# Altium PCB Thermostat_EEM_Cryo.PCBDOC (part 2 of 2)
Units mm, origin at the board's own origin, x right, y up, seen from the top; angles counter-clockwise.
Board outline 44.89 x 73.5 mm, 4 copper layers (TOP, G1, L2, BOT), stack 1.55 mm thick; 85 components, 79 nets, 401 pads, 80 vias.
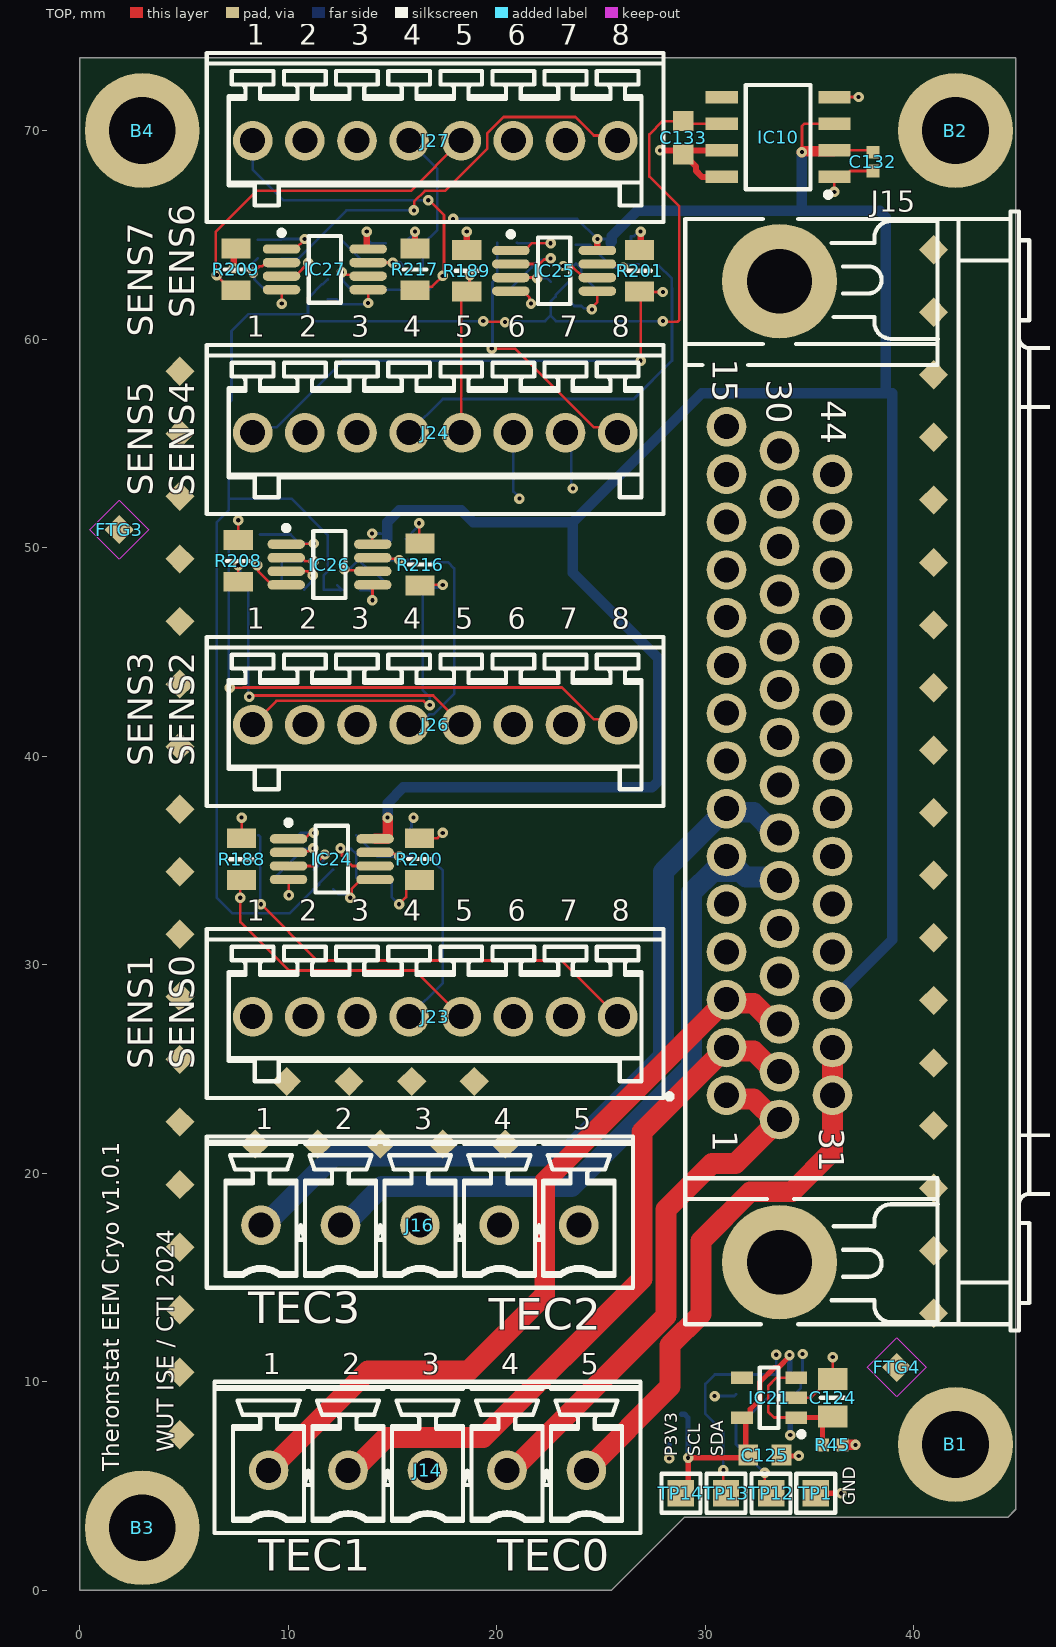
[diagram p0: TOP view]

## Via types
v1: diameter 0.5, hole 0.2, TOP to BOT, tented both sides, 80 vias

## Nets (pads, with @x,y where several pads share a name; then routed paths per layer and width w, separated by ;. In a path a pad name is that pad's centre, name@x,y a point inside that pad or via, vN(x,y) a via of type N, cw(c..) or ccw(c..) an arc to the next point about the centre after c; other vN are vias at no path point) (continued)
TECC3+: (continued)
  BOT w1: J16.2@12.742,17.595 14.509,19.362 23.591,19.362 29.348,25.119 29.348,33.462 30.367,34.481 31.673,34.481 31.95,34.204 33.388,34.204 J15.21
TECC3-: J15.7 J15.22 J16.1 | length 38.5
  BOT w1: J16.1@8.932,17.595 12.166,20.829 23.218,20.829 28,25.612 28,34.464 J15.7 31.192,37.312 32.327,37.312 33.316,36.322 J15.22
Vrefc0+: J15.37
Vrefc0-: J15.38
Vrefc1+: J15.39
Vrefc1-: J15.40
Vrefc2+: J15.41
Vrefc2-: J15.42
Vrefc3+: J15.43
Vrefc3-: J15.44
pads on no net: B1.1 B2.1 B3.1 B4.1 D35.1 D35.3 FTG1.1 FTG2.1 FTG3.1 FTG4.1 IC10.5 IC20.5 IC21.4

## Polygon pours and split planes (outlines as drawn)
GND on G1 (split plane): 44.383,58.83 44.356,58.785 44.319,58.698 44.297,58.606 44.29,58.512 44.29,56.59 44.29,19.049 44.297,18.955 44.319,18.863 44.356,18.776 44.383,18.731 44.383,4.102 44.292,4.01 28.993,4.01 28.894,4.001 28.798,3.972 28.71,3.924 28.632,3.861 25.282,0.51 0.51,0.51 0.51,72.99 44.383,72.99

## Other copper
G1 (plane layer: these items are gaps in the copper):
  lines w1.2: 44.892,19.049 44.892,56.59 44.892,58.512

## Silkscreen, mask and mechanical layers (free items; w line width, h text height)
TopOverlay:
  text "SENS6" at 5.5,61 h1.2 r90
  text "SENS7" at 3.5,60.114 h1.2 r90
  text "SENS5" at 3.5,52.5 h1.2 r90
  text "SENS4" at 5.5,52.5 h1.2 r90
  text "SENS3" at 3.5,39.514 h1.2 r90
  text "SENS2" at 5.5,39.514 h1.2 r90
  text "SENS1" at 3.5,25 h1.2 r90
  text "SENS0" at 5.5,25 h1.2 r90
  text "TEC3" at 8.09,12.817 h1.52
  text "TEC2" at 19.617,12.501 h1.52
  text "WUT ISE / CTI 2024" at 4.525,6.613 h0.8 r90
  text "P3V3" at 28.669,6.444 h0.6 r90
  text "SCL" at 29.77,6.444 h0.6 r90
  text "SDA" at 30.871,6.444 h0.6 r90
  text "Theromstat EEM Cryo v1.0.1" at 1.898,5.717 h0.8 r90
  text "GND" at 37.205,4.078 h0.6 r90
  text "TEC1" at 8.577,0.944 h1.52
  text "TEC0" at 20.029,0.944 h1.52
BottomOverlay:
  drawing of 1234 lines, arcs and shapes, not listed
  text "WUT ISE  / CTI 2024" at 39.205,31.766 h1.02 r270
  text "Thermostat EEM Cryo v1.0.1" at 41.14,18.812 h1.52 r270
Mechanical1:
  drawing of 302 lines, arcs and shapes, not listed
  text "Layer" at 71.781,56.459 h1.52
  text "Name" at 82.193,56.459 h1.52
  text "Material" at 104.285,56.459 h1.52
  text "Thickness" at 126.123,56.459 h1.52
  text "Constant" at 142.629,56.459 h1.52
  text "Board Layer Stack" at 157.103,56.459 h1.52
  text "TopOverlay" at 82.193,53.411 h1.52
  text "TopSolder" at 82.193,50.363 h1.52
  text "Solder Resist" at 104.285,50.363 h1.52
  text "0.010mm" at 126.123,50.363 h1.52
  text "3.5" at 142.629,50.363 h1.52
  text "1" at 71.781,47.315 h1.52
  text "TOP" at 82.193,47.315 h1.52
  text "0.035mm" at 126.123,47.315 h1.52
  text "Dielectric1" at 82.193,44.267 h1.52
  text "FR-4" at 104.285,44.267 h1.52
  text "0.180mm" at 126.123,44.267 h1.52
  text "4.8" at 142.629,44.267 h1.52
  text "2" at 71.781,41.219 h1.52
  text "G1" at 82.193,41.219 h1.52
  text "CF-004" at 104.285,41.219 h1.52
  text "0.035mm" at 126.123,41.219 h1.52
  text "Dielectric2" at 82.193,38.171 h1.52
  text "Core-042" at 104.285,38.171 h1.52
  text "1.050mm" at 126.123,38.171 h1.52
  text "4.6" at 142.629,38.171 h1.52
  text "3" at 71.781,35.123 h1.52
  text "L2" at 82.193,35.123 h1.52
  text "CF-004" at 104.285,35.123 h1.52
  text "0.035mm" at 126.123,35.123 h1.52
  text "Dielectric3" at 82.193,32.075 h1.52
  text "FR-4" at 104.285,32.075 h1.52
  text "0.180mm" at 126.123,32.075 h1.52
  text "4.8" at 142.629,32.075 h1.52
  text "4" at 71.781,29.027 h1.52
  text "BOT" at 82.193,29.027 h1.52
  text "0.035mm" at 126.123,29.027 h1.52
  text "BottomSolder" at 82.193,25.979 h1.52
  text "Solder Resist" at 104.285,25.979 h1.52
  text "0.010mm" at 126.123,25.979 h1.52
  text "3.5" at 142.629,25.979 h1.52
  text "BottomOverlay" at 82.193,22.931 h1.52

## Text inside footprints (layer, text, board x,y; h text height)
J14: TopOverlay "1" at 8.789,10.356 h1; TopOverlay "2" at 12.599,10.356 h1; TopOverlay "3" at 16.409,10.356 h1; TopOverlay "4" at 20.219,10.356 h1; TopOverlay "5" at 24.029,10.356 h1
J15: TopOverlay "15" at 30.36,59.064 h1.2 r270; TopOverlay "31" at 35.46,22.164 h1.2 r270; TopOverlay "44" at 35.56,57.064 h1.2 r270; TopOverlay "30" at 32.96,58.064 h1.2 r270; TopOverlay "1" at 30.36,22.064 h1.2 r270; Mechanical14 "15" at 30.36,59.064 h1.2 r270; Mechanical14 "31" at 35.46,22.164 h1.2 r270; Mechanical14 "44" at 35.56,57.064 h1.2 r270; Mechanical14 "30" at 32.96,58.064 h1.2 r270; Mechanical14 "1" at 30.36,22.064 h1.2 r270; Mechanical8 "PCB Edge" at 43.16,42.564 h1 r270
J16: TopOverlay "1" at 8.425,22.114 h1; TopOverlay "2" at 12.235,22.114 h1; TopOverlay "3" at 16.045,22.114 h1; TopOverlay "4" at 19.855,22.114 h1; TopOverlay "5" at 23.665,22.114 h1
J23: TopOverlay "7" at 23.025,32.114 h1; TopOverlay "5" at 18.025,32.114 h1; TopOverlay "3" at 13.025,32.114 h1; TopOverlay "2" at 10.525,32.114 h1; TopOverlay "1" at 8.025,32.114 h1; TopOverlay "4" at 15.525,32.114 h1; TopOverlay "6" at 20.525,32.114 h1; TopOverlay "8" at 25.525,32.114 h1
J24: TopOverlay "8" at 25.525,60.114 h1; TopOverlay "6" at 20.525,60.114 h1; TopOverlay "4" at 15.525,60.114 h1; TopOverlay "1" at 8.025,60.114 h1; TopOverlay "2" at 10.525,60.114 h1; TopOverlay "3" at 13.025,60.114 h1; TopOverlay "5" at 18.025,60.114 h1; TopOverlay "7" at 23.025,60.114 h1
J26: TopOverlay "7" at 23.025,46.114 h1; TopOverlay "5" at 18.025,46.114 h1; TopOverlay "3" at 13.025,46.114 h1; TopOverlay "2" at 10.525,46.114 h1; TopOverlay "1" at 8.025,46.114 h1; TopOverlay "4" at 15.525,46.114 h1; TopOverlay "6" at 20.525,46.114 h1; TopOverlay "8" at 25.525,46.114 h1
J27: TopOverlay "7" at 23.025,74.114 h1; TopOverlay "5" at 18.025,74.114 h1; TopOverlay "3" at 13.025,74.114 h1; TopOverlay "2" at 10.525,74.114 h1; TopOverlay "1" at 8.025,74.114 h1; TopOverlay "4" at 15.525,74.114 h1; TopOverlay "6" at 20.525,74.114 h1; TopOverlay "8" at 25.525,74.114 h1